# Altium PCB PCB_Amplificador_instrumentacion.PcbDoc
Units mm, origin at the board's own origin, x right, y up, seen from the top; angles counter-clockwise.
Board outline 50.04 x 50.04 mm, 2 copper layers (Top Layer, Bottom Layer); 15 components, 15 nets, 43 pads, 6 vias.
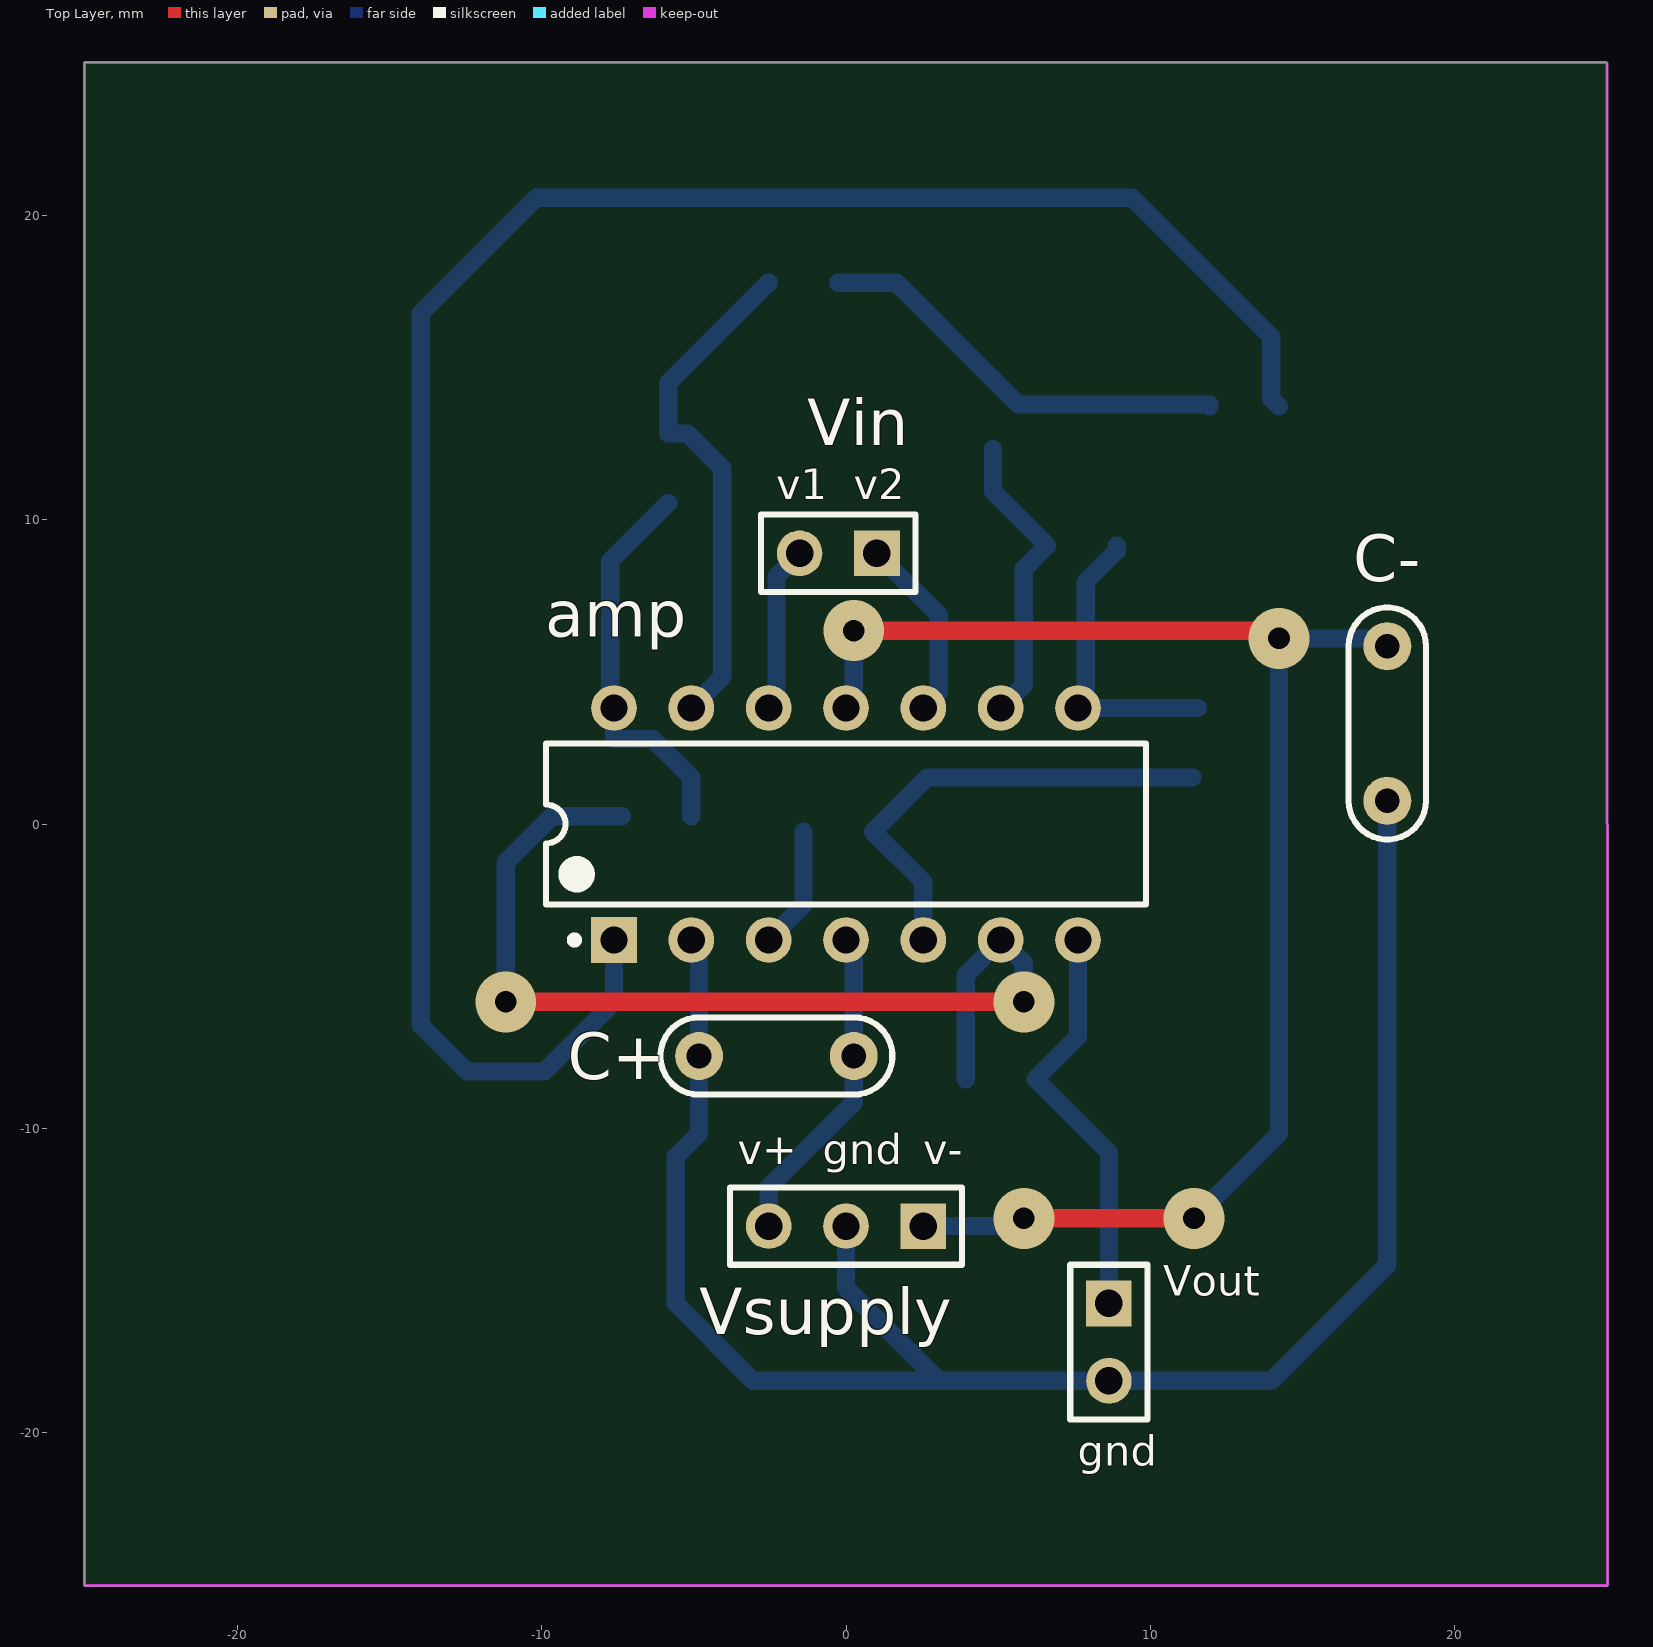
[diagram p0: Top Layer view]
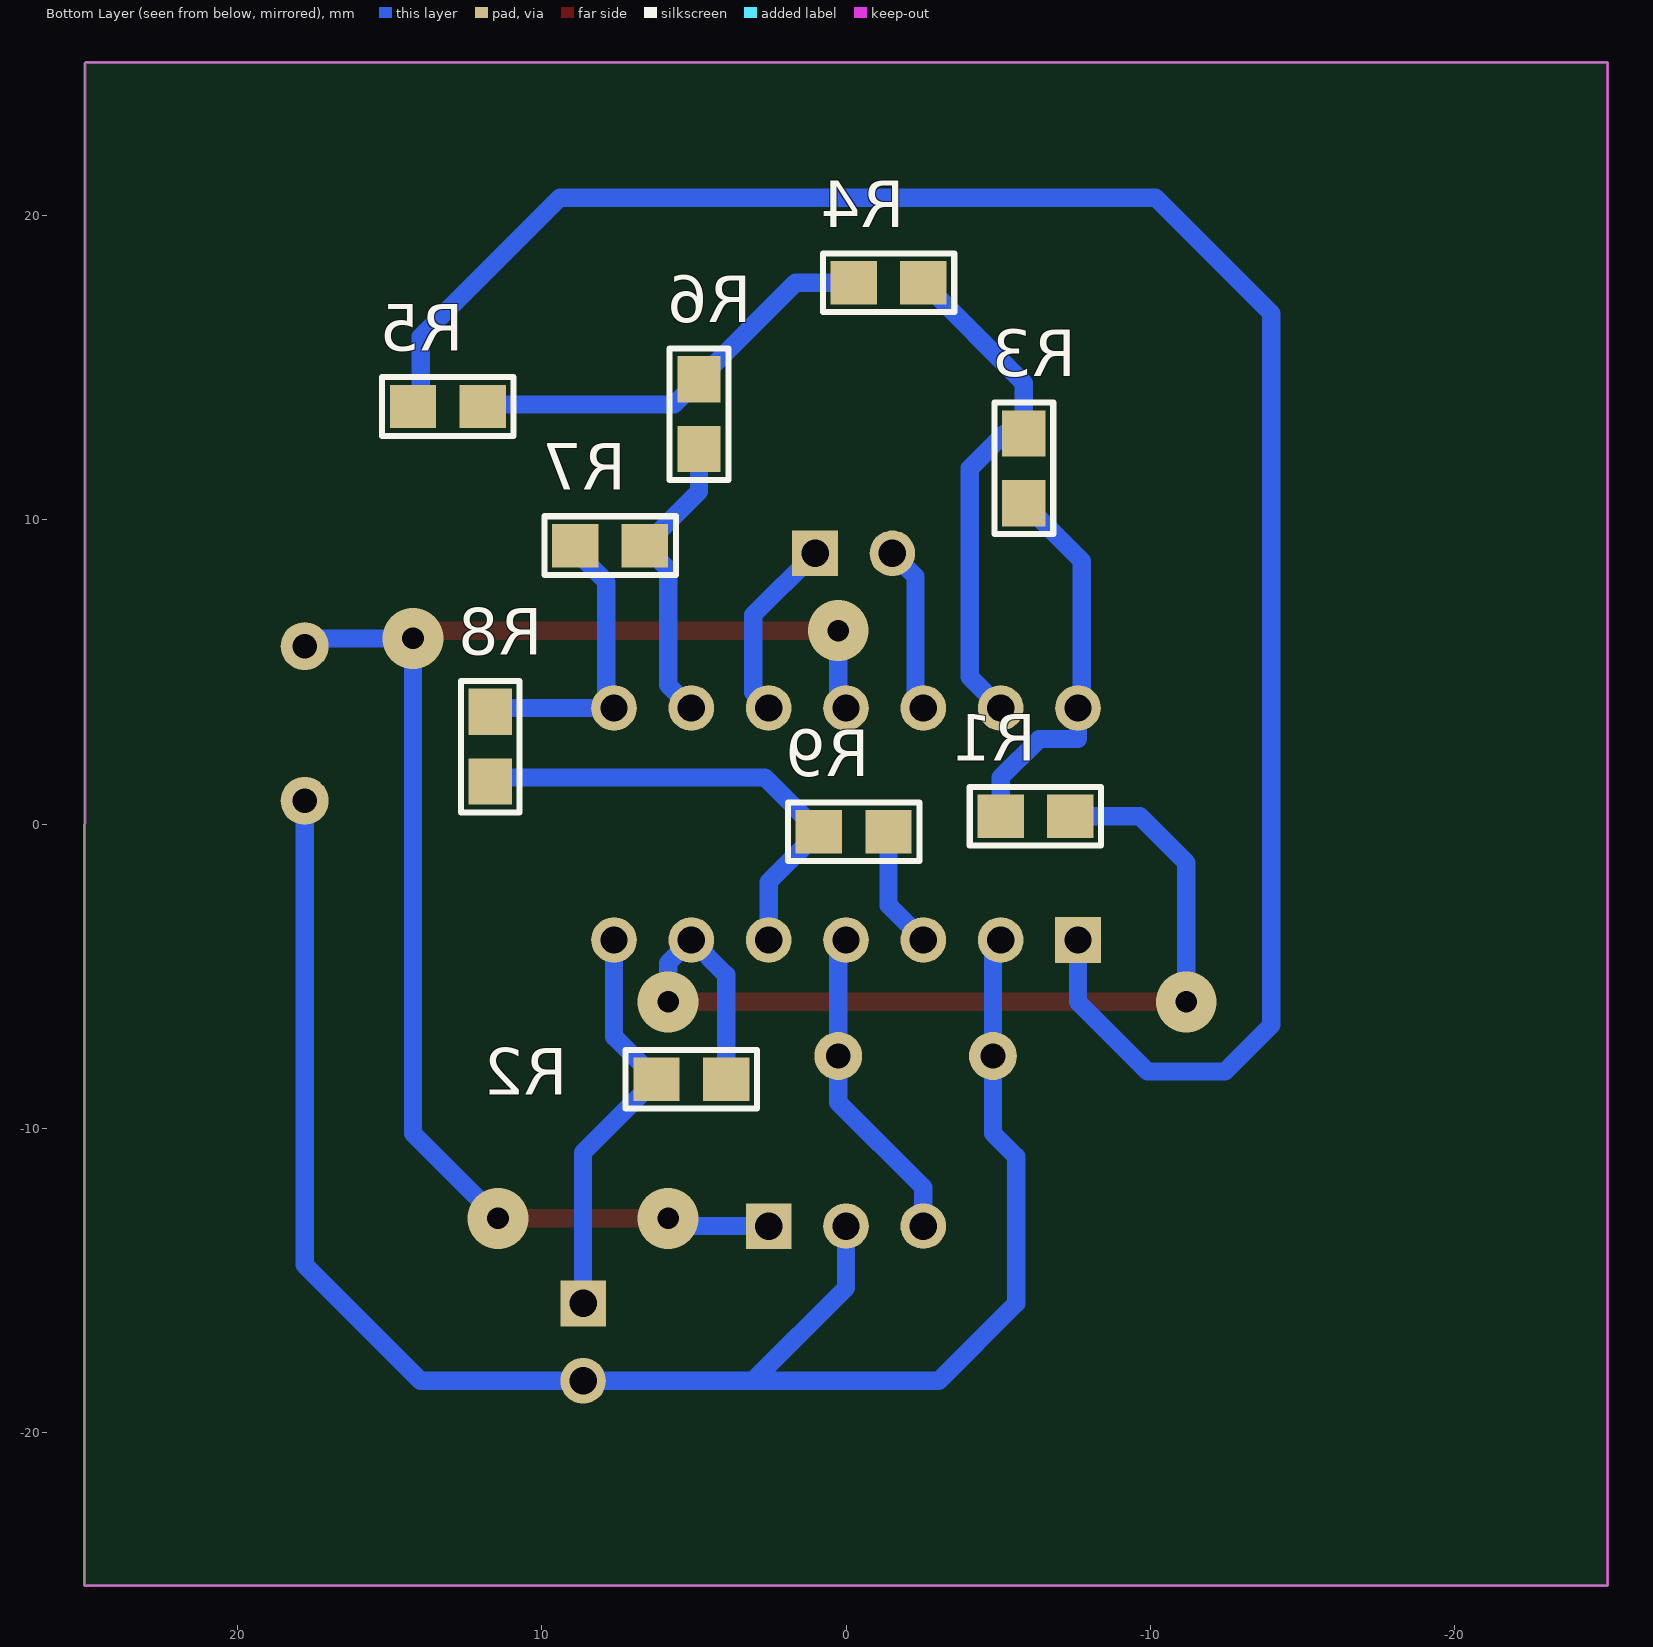
[diagram p1: Bottom Layer view, seen from below]
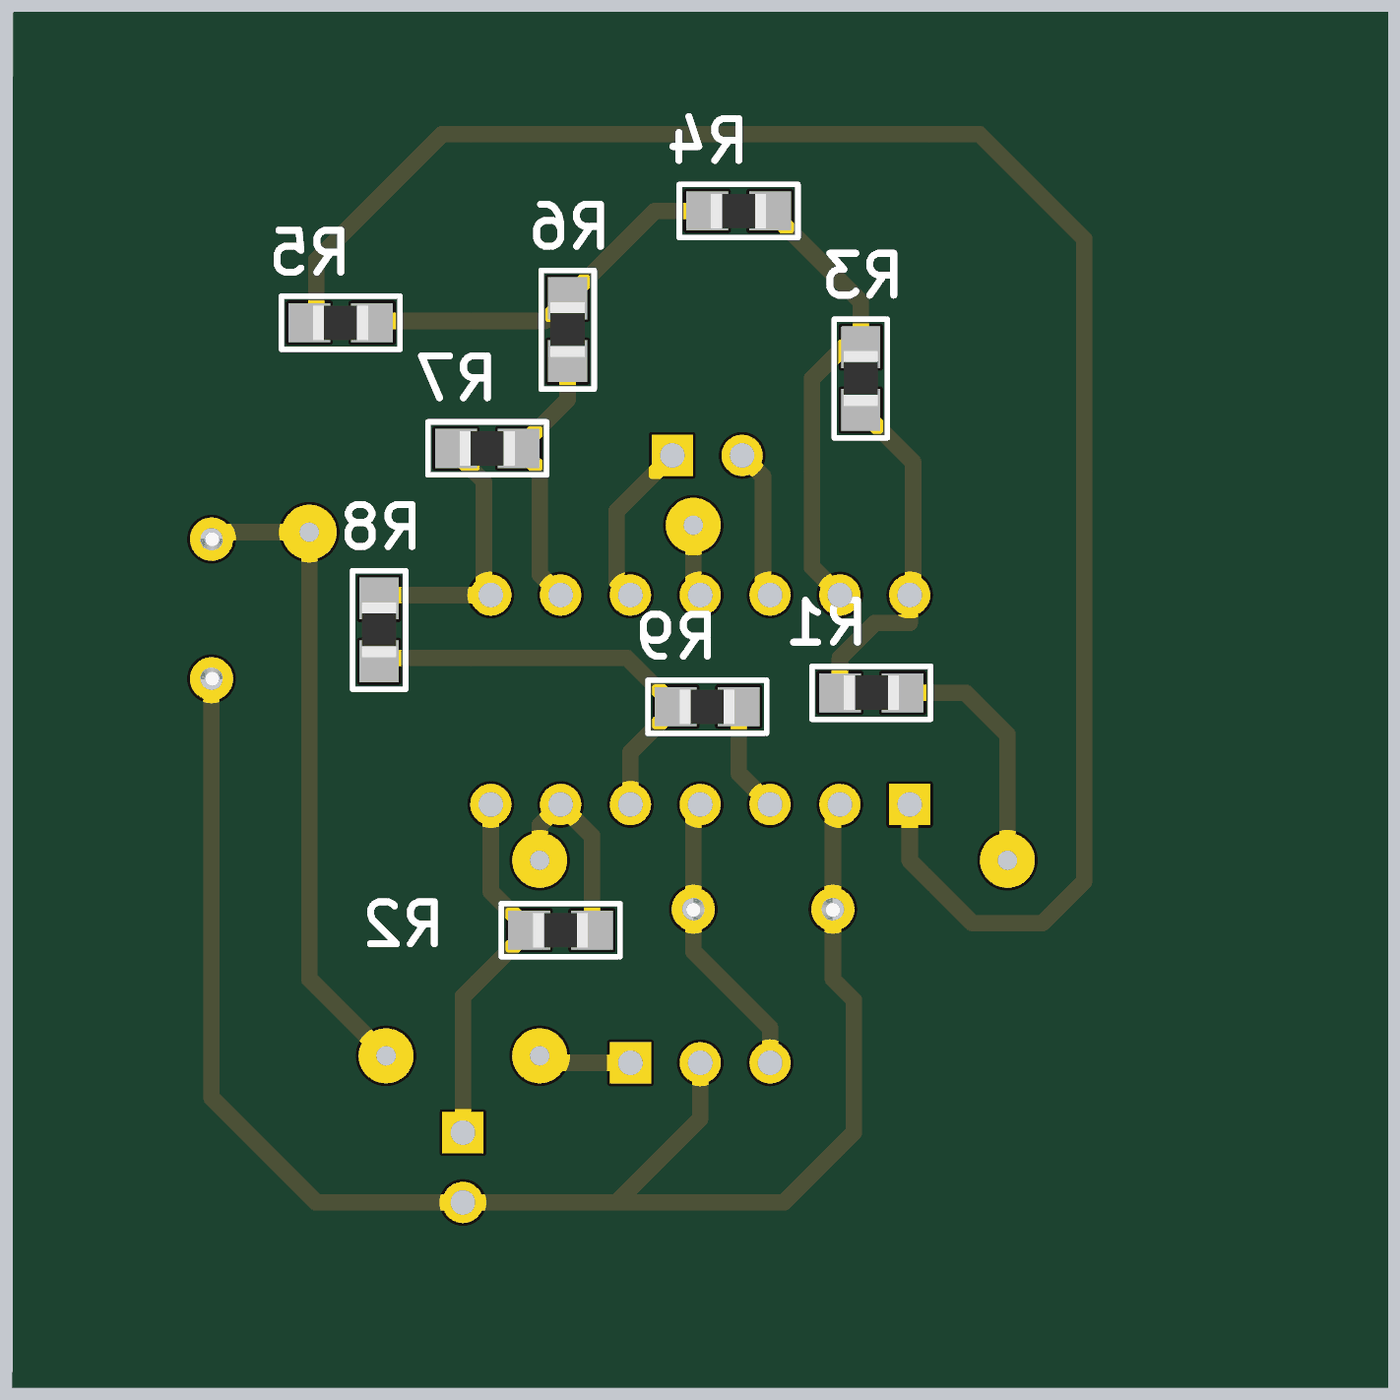
[diagram p2: 3D render of the assembled board from below, using the file's embedded part models]

## Layer stack, top to bottom
Top Solder: solder mask 0.0102, Solder Resist, Dk 3.5
Top Layer: signal copper 0.0356
Dielectric1: dielectric 0.32, FR-4, Dk 4.8
Bottom Layer: signal copper 0.0356
Bottom Solder: solder mask 0.0102, Solder Resist, Dk 3.5

## Board outline
25,25 24.981,25.019 -25.019,25.019 -25.019,-25.019 25.019,-25.019

## Design rules (kind name [scope] priority, off if disabled: settings)
Clearance [All] p1: gap=0.4 ignorepadtopadclearanceinfootprint=FALSE except(0: Arc-Hole Track-Hole SMDPad-Hole THPad-Hole Via-Hole Fill-Hole Poly-Hole Region-Hole Text-Hole)
PolygonConnect [All] p1: connectstyle=Relief reliefconductorwidth=0.254 reliefentries=4 polygonreliefangle="90 Angle" airgapwidth=0.254
RoutingVias [All] p1: holewidth=0.4 width=1.7 viastyle="Through Hole" minholewidth=0.3 minwidth=1.5 maxholewidth=0.5 maxwidth=2
SolderMaskExpansion [All] p1: expansion=0.102
Width [All] p1: maxlimit=0.9 minlimit=0.6 preferedwidth=0.7
30 further rules are at their usual default settings.

## Classes and differential pairs
component class Schematic_Ej3_Amp_Instrumentacion: C+ C- R1 R2 R3 R4 R5 R6 R7 R8 R9 Vin Vout Vsupply

## Components (designator, comment, footprint, x,y, rotation, side; value= is the part's Value field where it differs from the comment)
amp "TL084IN" TI-N14 0,0 r90 top
C+ "CAP" CAP200 -2.286,-7.62 r0 top
C- "CAP" CAP200 17.78,3.302 r270 top
R1 "RES" 0805 -6.223,0.254 r0 bottom
R2 "RES" 0805 5.08,-8.382 r180 bottom
R3 "RES" 0805 -5.842,11.684 r270 bottom
R4 "RES" 0805 -1.397,17.78 r180 bottom
R5 "RES" 0805 13.081,13.716 r180 bottom
R6 "RES" 0805 4.826,13.462 r270 bottom
R7 "RES" 0805 7.747,9.144 r180 bottom
R8 "RES" 0805 11.684,2.54 r270 bottom
R9 "RES" 0805 -0.254,-0.254 r180 bottom
Vin "Vin" HDR1X2 1.016,8.89 r180 top
Vout "Vout" HDR1X2 8.636,-15.748 r270 top
Vsupply "Vsupply" HDR1X3 2.54,-13.208 r180 top

## Footprints (in the part's own frame and the unit in brackets; to place one, negate y for a bottom-side part, rotate by r counter-clockwise, add the part's x,y. Pads: shape width x height; smd on the part's side, far side on the other; paste and mask are expansions set on the pad)
0805 [mil] "Pasivo 0805"
  rect 60x56 smd: 1(-45,0) 2(45,0)
  silkscreen extent -85,-38 85,38, body extent -39,-25 39,24, height 15
CAP200 [mil]
  round 62 hole 32: 1(-100,0) 2(100,0)
  silkscreen extent -150,-50 150,50, body extent -110,-46 110,44, height 246
HDR1X2 [mm] "Connector; Header; 2 Position"
  rect 1.5x1.5 hole 0.9: 1(0,0)
  round 1.5 hole 0.9: 2(2.54,0)
  silkscreen extent -1.27,-1.27 3.81,1.27
HDR1X3 [mm] "Connector; Header; 3 Position"
  rect 1.5x1.5 hole 0.9: 1(0,0)
  round 1.5 hole 0.9: 2(2.54,0) 3(5.08,0)
  silkscreen extent -1.27,-1.27 6.35,1.27
TI-N14 [mm] "DIP, 14-Leads, Body 19.305x6.35 mm, Pitch 2.54 mm"
  rect 1.5x1.5 hole 0.9: 1(-3.81,7.62)
  round 1.5 hole 0.9: 2(-3.81,5.08) 3(-3.81,2.54) 4(-3.81,0) 5(-3.81,-2.54) 6(-3.81,-5.08) 7(-3.81,-7.62) 8(3.81,-7.62) 9(3.81,-5.08) 10(3.81,-2.54) 11(3.81,0) 12(3.81,2.54) 13(3.81,5.08) 14(3.81,7.62)
  silkscreen extent -3.93,-9.85 2.65,9.85, body extent -3.3,-9.85 3.3,9.85, height 5.08

## Part data
amp: "JFET-Input Operational Amplifier, 7 to 36 V, -40 to 85 degC, 14-pin DIP (N14), Pb-Free (RoHS)"
Vin Vout: library part "Header 2", "Header, 2-Pin"
Vsupply: library part "Header 3", "Header, 3-Pin"

## Via types
v1: diameter 2, hole 0.711, Top Layer to Bottom Layer, 6 vias

## Nets (pads, with @x,y where several pads share a name; then routed paths per layer and width w, separated by ;. In a path a pad name is that pad's centre, name@x,y a point inside that pad or via, vN(x,y) a via of type N, cw(c..) or ccw(c..) an arc to the next point about the centre after c; other vN are vias at no path point)
GND: amp.2 C+.1 C-.2 Vout.2 Vsupply.2 | length 59.9
  Bottom Layer w0.6: amp.2 -4.826,-4.064 C+.1 -4.826,-10.16 -5.588,-10.922 -5.588,-15.748 -3.048,-18.288 3.048,-18.288 ; Vsupply.2 0,-15.24 3.048,-18.288 ; C-.2 17.78,-14.478 13.97,-18.288 Vout.2 3.048,-18.288
Netamp_3: amp.3 R9.2 | length 4
  Bottom Layer w0.6: amp.3 -1.397,-2.667 R9.2
Netamp_5: amp.5 R8.2 R9.1 | length 15.5
  Bottom Layer w0.6: amp.5 2.54,-1.905 R9.1 2.667,1.524 R8.2@11.38,1.524
Netamp_6: amp.6 R1.1 R2.2 | length 33.4
  Top Layer w0.6: v1(-11.176,-5.842) v1(5.842,-5.842)
  Bottom Layer w0.6: v1(-11.176,-5.842) -11.176,-1.27 -9.652,0.254 R1.1 ; R2.2 3.937,-4.953 amp.6 5.842,-4.572 v1(5.842,-5.842)
Netamp_8: amp.8 R7.1 R8.1 | length 9.8
  Bottom Layer w0.6: R7.1 8.89,8.967 7.874,7.951 7.874,4.064 amp.8 R8.1@11.557,3.81
Netamp_9: amp.9 R6.2 R7.2 | length 9.9
  Bottom Layer w0.6: R6.2 4.826,10.922 R7.2 5.842,8.382 5.842,4.572 amp.9
Netamp_13: amp.13 R3.1 R4.2 | length 16.9
  Bottom Layer w0.6: amp.13 -4.064,4.826 -4.064,11.684 -5.207,12.827 R3.1 -5.842,14.478 R4.2
Netamp_14: amp.14 R1.2 R3.2 | length 12.9
  Bottom Layer w0.6: R3.2 -7.747,8.636 -7.747,3.937 amp.14 -7.62,2.794 -6.35,2.794 -5.08,1.524 R1.2
NetR4_1: R4.1 R5.2 R6.1 | length 13.9
  Bottom Layer w0.6: R4.1 1.651,17.78 R6.1 5.65,13.781 11.938,13.781 R5.2
V1: amp.12 Vin.2 | length 5.5
  Bottom Layer w0.6: amp.12 -2.286,4.064 -2.286,8.128 Vin.2
V2: amp.10 Vin.1 | length 6.1
  Bottom Layer w0.6: Vin.1 3.048,6.858 3.048,4.318 amp.10
V+: amp.4 C+.2 Vsupply.3 | length 10.7
  Bottom Layer w0.6: Vsupply.3 -2.54,-11.938 0.254,-9.144 C+.2 0.254,-4.064 amp.4
V-: amp.11 C-.1 Vsupply.1 | length 49.7
  Top Layer w0.6: v1(0.254,6.35) 13.97,6.35 v1(14.224,6.096) ; v1(5.842,-12.954) v1(11.43,-12.954)
  Bottom Layer w0.6: amp.11 0.254,3.81 v1(0.254,6.35) ; Vsupply.1 5.588,-13.208 v1(5.842,-12.954) ; v1(11.43,-12.954) 14.224,-10.16 v1(14.224,6.096) 17.526,6.096 C-.1
VFEED: amp.1 R5.1 | length 67.1
  Bottom Layer w0.6: amp.1 -7.62,-5.842 -9.906,-8.128 -12.446,-8.128 -13.97,-6.604 -13.97,16.764 -10.16,20.574 9.398,20.574 13.97,16.002 13.97,13.97 R5.1
VOUT: amp.7 R2.1 Vout.1 | length 13.5
  Bottom Layer w0.6: amp.7 7.62,-6.985 R2.1 8.636,-10.795 Vout.1

## Keep-outs
Keep-Out Layer:
  lines w0.1: 24.981,25.019 -25.019,25.019 -25.019,-25.019 25.019,-25.019 25,25

## Silkscreen, mask and mechanical layers (free items; w line width, h text height)
Top Overlay:
  text "v1" at -2.286,10.668 h1
  text "v2" at 0.254,10.668 h1
  text "v+" at -3.556,-11.176 h1
  text "gnd" at -0.762,-11.176 h1
  text "v-" at 2.54,-11.176 h1
  text "gnd" at 7.62,-21.082 h1
Mechanical 1:
  lines w0.1: 24.981,25.019 25,25